# EAGLE board power_board2_v1.0 (EAGLE 9.5.1)
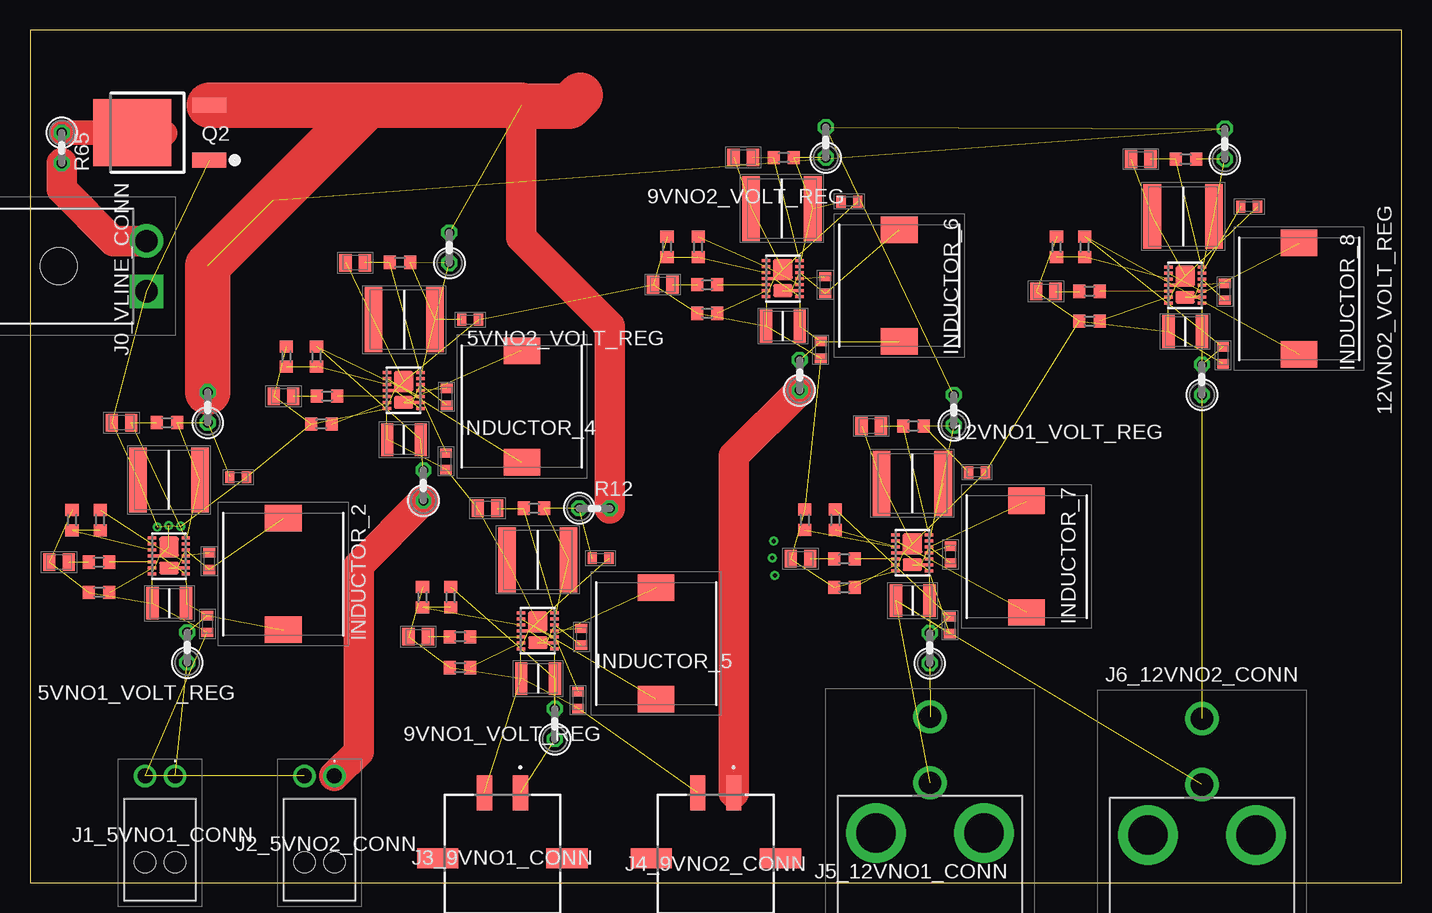
[diagram p0: board, top side]

Size 114.3 x 71.12 mm. Coordinates in mm from the lower left corner, seen from the top.
Outline: 0,0 114.3,0 114.3,71.12 0,71.12 0,0
Copper layers (1*16): Top 0.035mm / dielectric 1.5mm / Bottom 0.035mm
Design rules "default": minimum track width 6mil, minimum drill 0.35mm, track to track 6mil, track to pad 6mil, pad to pad 6mil, via to via 6mil, smd to smd 6mil, copper to edge 40mil, drill to drill 6mil, minimum pad ring 10mil, minimum via ring 8mil, stop-mask expansion 4mil, vias tented up to drill 0mil, thermal gap 10mil

## Footprints (pad centres in the part's own frame; a part is rotated, then mirrored left to right if it is on the bottom)
DFN14-4X3DE = smd 0.25 x 0.7: 1 -1.5,-1.4; 2 -1,-1.4; 3 -0.5,-1.4; 5 0.5,-1.4; 6 1,-1.4; 7 1.5,-1.4; 8 1.5,1.4; 10 0.5,1.4; 11 0,1.4; 12 -0.5,1.4; 13 -1,1.4; 14 -1.5,1.4 | smd 0.25 x 2: 4 0,-0.75; 9 1,0.75 | smd 1.75 x 1.65: 4@1 -0.75,0 | smd 1.07 x 1.65: 9@2 1,0
CAPC5750X279N = smd 1.47 x 5.41: 1 -2.57,0; 2 2.57,0
CAPC1608X90N = smd 0.78 x 0.99: 1 -0.7,0; 2 0.7,0
CAPC2012X140N = smd 1.02 x 1.47: 1 -0.81,0; 2 0.81,0
CAPC3225X279N = smd 1.02 x 2.72: 1 -1.4,0; 2 1.4,0
INDPM102100X400N = smd 2.2 x 3.05: 1 -4.65,0; 2 4.65,0
1726480102 = drill 1.85 pad 2.775 square: 1 0,0 | drill 1.85 pad 2.775: 2 -4.2,0 | hole 3.05: -2.1,-7.3
1053131102 = drill 1.25 pad 1.875: 1 0,0; 2 -2.5,0 | hole 1.75: 0,-7.18; -2.5,-7.18
43650-0214 = smd 1.27 x 2.92: 1 1.5,10.07; 2 -1.5,10.07 | smd 3.43 x 1.65: 3 -5.385,4.6; 4 5.385,4.6
874270212 = drill 1.85 pad 2.775: 1 0,0; 2 0,5.5 | drill 3.3 pad 4.95: MH1 -4.5,-4.2; MH2 4.5,-4.2
DPAK3-CASE-369AS = smd 1.25 x 2.85: 1 -2.28,-6.4; 2 2.28,-6.4 | smd 5.55 x 6.5: 3 0,0
R0603 = smd 1 x 1.1: 1 -0.85,0; 2 0.85,0
0207/2V = drill 0.813 octagon: 1 -1.27,0; 2 1.27,0

## Placement (x,y rotation side)
5VNO1_VOLT_REG  LT3681  [DFN14-4X3DE]  11.58,27.25 270 top
5VNO2_VOLT_REG  LT3681  [DFN14-4X3DE]  31.14,41.07 270 top
9VNO1_VOLT_REG  LT3681  [DFN14-4X3DE]  42.32,21.03 270 top
9VNO2_VOLT_REG  LT3681  [DFN14-4X3DE]  62.74,50.39 270 top
12VNO1_VOLT_REG  LT3681  [DFN14-4X3DE]  73.53,27.53 270 top
12VNO2_VOLT_REG  LT3681  [DFN14-4X3DE]  96.27,49.83 270 top
C1  10u  [CAPC5750X279N]  31.19,46.96 180 top
C2  100n  [CAPC1608X90N]  36.68,46.96 0 top
C3  .33n  [CAPC2012X140N]  21.13,40.59 180 top
C4  .33n  [CAPC2012X140N]  2.41,26.75 180 top
C5  10u  [CAPC5750X279N]  42.32,26.95 180 top
C6  220n  [CAPC2012X140N]  7.62,38.38 180 top
C7  50.8u  [CAPC3225X279N]  11.61,23.32 180 top
C8  470n  [CAPC1608X90N]  14.94,26.82 270 top
C9  100n  [CAPC1608X90N]  14.78,21.59 270 top
C10  100n  [CAPC1608X90N]  47.55,27.08 0 top
C11  .33n  [CAPC2012X140N]  32.36,20.52 180 top
C12  220n  [CAPC2012X140N]  38.13,31.24 180 top
C13  10u  [CAPC5750X279N]  62.66,56.24 180 top
C14  220n  [CAPC2012X140N]  27.1,51.71 180 top
C15  50.8u  [CAPC3225X279N]  31.17,36.96 180 top
C16  100n  [CAPC1608X90N]  68.28,56.82 0 top
C17  .33n  [CAPC2012X140N]  52.73,49.89 180 top
C18  220n  [CAPC2012X140N]  59.44,60.5 180 top
C19  26.7u  [CAPC3225X279N]  42.34,17.04 180 top
C20  470n  [CAPC1608X90N]  45.95,20.52 270 top
C21  470n  [CAPC1608X90N]  66.27,49.86 270 top
C22  26.7u  [CAPC3225X279N]  62.74,46.43 180 top
C23  470n  [CAPC1608X90N]  76.71,27.38 270 top
C24  22u  [CAPC3225X279N]  73.56,23.55 180 top
C25  470n  [CAPC1608X90N]  99.57,49.3 270 top
C26  10u  [CAPC5750X279N]  73.53,33.32 180 top
C27  100n  [CAPC1608X90N]  78.92,34.24 0 top
C28  .33n  [CAPC2012X140N]  64.21,27.03 180 top
C29  220n  [CAPC2012X140N]  70.1,38.1 180 top
C30  10u  [CAPC5750X279N]  96.09,55.58 180 top
C31  100n  [CAPC1608X90N]  101.6,56.39 0 top
C32  22u  [CAPC3225X279N]  96.27,45.97 180 top
C33  470n  [CAPC1608X90N]  34.72,40.54 270 top
C34  100n  [CAPC1608X90N]  34.67,35.15 270 top
C35  .33n  [CAPC2012X140N]  84.66,49.33 180 top
C36  220n  [CAPC2012X140N]  92.56,60.35 180 top
C58  10u  [CAPC5750X279N]  11.58,33.6 180 top
C59  100n  [CAPC1608X90N]  17.35,33.83 0 top
C60  100n  [CAPC1608X90N]  45.67,15.24 270 top
C61  100n  [CAPC1608X90N]  65.89,44.45 270 top
C62  100n  [CAPC1608X90N]  99.42,43.99 270 top
C63  100n  [CAPC1608X90N]  76.66,21.49 270 top
INDUCTOR_2  CDRH104RNP-150NC  [INDPM102100X400N]  21.11,25.76 270 top
INDUCTOR_4  CDRH104RNP-150NC  [INDPM102100X400N]  41,39.73 270 top
INDUCTOR_5  CDRH104RNP-150NC  [INDPM102100X400N]  52.17,19.96 270 top
INDUCTOR_6  CDRH104RNP-150NC  [INDPM102100X400N]  72.44,49.81 270 top
INDUCTOR_7  CDRH104RNP-150NC  [INDPM102100X400N]  83.06,27.2 270 top
INDUCTOR_8  CDRH104RNP-150NC  [INDPM102100X400N]  105.77,48.72 270 top
J0_VLINE_CONN  172648-0102  [1726480102]  9.7,49.33 270 top
J1_5VNO1_CONN  105313-1102  [1053131102]  12.09,8.92 0 top
J2_5VNO2_CONN  105313-1102  [1053131102]  25.37,8.92 0 top
J3_9VNO1_CONN  43650-0212  [43650-0214]  39.37,-2.54 0 top
J4_9VNO2_CONN  43650-0212  [43650-0214]  57.15,-2.54 0 top
J5_12VNO1_CONN  87427-0212  [874270212]  75.01,8.36 0 top
J6_12VNO2_CONN  87427-0212  [874270212]  97.66,8.2 0 top
Q2  FQD11P06TM  [DPAK3-CASE-369AS]  8.53,62.56 90 top
R1  133k  [R0603]  35.84,17.96 0 top
R2  133k  [R0603]  24.28,38.28 0 top
R3  20k  [R0603]  24.77,40.59 0 top
R4  15k  [R0603]  30.84,51.74 0 top
R5  0  [0207/2V]  34.95,52.96 90 top
R6  15k  [R0603]  11.43,38.38 0 top
R7  0  [0207/2V]  14.81,39.65 90 top
R8  200k  [R0603]  3.51,30.25 270 top
R9  590k  [R0603]  5.84,30.25 270 top
R10  20k  [R0603]  35.84,20.52 0 top
R11  15k  [R0603]  42.01,31.24 0 top
R12  0  [0207/2V]  47.04,31.24 0 top
R13  133k  [R0603]  56.44,47.5 0 top
R14  0  [0207/2V]  13.11,19.63 90 top
R15  200k  [R0603]  21.36,43.89 270 top
R16  20k  [R0603]  56.44,49.89 0 top
R17  15k  [R0603]  62.81,60.48 0 top
R18  0  [0207/2V]  66.32,61.75 90 top
R19  133k  [R0603]  32.72,23.83 270 top
R20  806k  [R0603]  35.05,23.83 270 top
R21  0  [0207/2V]  43.74,13.26 90 top
R22  100k  [R0603]  64.57,30.28 270 top
R23  845k  [R0603]  67.11,30.28 270 top
R24  0  [0207/2V]  74.98,19.58 90 top
R25  100k  [R0603]  85.55,53.04 270 top
R26  845k  [R0603]  87.88,53.04 270 top
R27  0  [0207/2V]  97.66,41.96 90 top
R28  133k  [R0603]  67.87,24.64 0 top
R29  20k  [R0603]  67.87,27.03 0 top
R30  15k  [R0603]  73.61,38.1 0 top
R31  0  [0207/2V]  76.99,39.42 90 top
R32  133k  [R0603]  53.09,53.04 270 top
R33  590k  [R0603]  23.88,43.89 270 top
R34  0  [0207/2V]  32.79,33.15 90 top
R35  133k  [R0603]  88.29,46.84 0 top
R36  20k  [R0603]  88.29,49.33 0 top
R61  133k  [R0603]  5.77,24.23 0 top
R62  20k  [R0603]  5.74,26.75 0 top
R63  806k  [R0603]  55.68,53.04 270 top
R64  0  [0207/2V]  64.14,42.34 90 top
R65  0  [0207/2V]  2.64,61.29 270 top
R68  15k  [R0603]  96.32,60.35 0 top
R69  0  [0207/2V]  99.57,61.62 90 top

## Library data of the parts
5VNO1_VOLT_REG 5VNO2_VOLT_REG 9VNO1_VOLT_REG 9VNO2_VOLT_REG 12VNO1_VOLT_REG 12VNO2_VOLT_REG = linear-technology; MPN: LT3681EDE#PBF; OC_FARNELL: 1627603; OC_NEWARK: 57M8550
C1 C5 C13 C26 C30 C58 = 22201C106KAT2A; DESCRIPTION: Cap Ceramic 10uF 100V X7R 10% Pad SMD 2220 125C T/R; HEIGHT: 2.79mm; MANUFACTURER_NAME: AVX; MANUFACTURER_PART_NUMBER: 22201C106KAT2A; MOUSER_PART_NUMBER: 581-22201C106KAT2A; MOUSER_PRICE-STOCK: https://www.mouser.com/Search/Refine.aspx?Keyword=581-22201C106KAT2A
C2 C10 C16 C27 C31 C59 = 06031C104KAT2A; DESCRIPTION: AVX - 06031C104KAT2A - CAP, MLCC, X7R, 0.1UF, 100V, 0603; HEIGHT: 0.9mm; MANUFACTURER_NAME: AVX; MANUFACTURER_PART_NUMBER: 06031C104KAT2A; MOUSER_PART_NUMBER: 581-06031C104KAT2A; MOUSER_PRICE-STOCK: https://www.mouser.com/Search/Refine.aspx?Keyword=581-06031C104KAT2A
C3 C4 C11 C17 C28 C35 = 08053C334KAT2A; DESCRIPTION: AVX 0805 Standard 0.33uF Ceramic Multilayer Capacitor, 25 V dc, +125; HEIGHT: 1.4mm; MANUFACTURER_NAME: AVX; MANUFACTURER_PART_NUMBER: 08053C334KAT2A; MOUSER_PART_NUMBER: 581-08053C334KAT2A; MOUSER_PRICE-STOCK: https://www.mouser.com/Search/Refine.aspx?Keyword=581-08053C334KAT2A; RS_PART_NUMBER: 1747387; RS_PRICE-STOCK: http://uk.rs-online.com/web/p/products/1747387
C6 C12 C14 C18 C29 C36 = 08051C224KAT2A; DESCRIPTION: Cap Ceramic 0.22uF 100V X7R 10% Pad SMD 0805 125C T/R; HEIGHT: 1.4mm; MANUFACTURER_NAME: AVX; MANUFACTURER_PART_NUMBER: 08051C224KAT2A; MOUSER_PART_NUMBER: 581-08051C224KAT2A; MOUSER_PRICE-STOCK: https://www.mouser.com/Search/Refine.aspx?Keyword=581-08051C224KAT2A
C7 C15 C19 C22 C24 C32 = 12103C226KAT2A; DESCRIPTION: Multilayer Ceramic Capacitors MLCC - SMD/SMT 25V 22uF X7R 1210 0.1; HEIGHT: 2.79mm; MANUFACTURER_NAME: AVX; MANUFACTURER_PART_NUMBER: 12103C226KAT2A; MOUSER_PART_NUMBER: 581-12103C226KAT2A; MOUSER_PRICE-STOCK: https://www.mouser.com/Search/Refine.aspx?Keyword=581-12103C226KAT2A
C8 C20 C21 C23 C25 C33 = 06033C474JAT2A; DESCRIPTION: Multilayer Ceramic Capacitors MLCC - SMD/SMT 25V 470nF X7R 0603 +5%; HEIGHT: 0.9mm; MANUFACTURER_NAME: AVX; MANUFACTURER_PART_NUMBER: 06033C474JAT2A; MOUSER_PART_NUMBER: 581-06033C474JAT2A; MOUSER_PRICE-STOCK: https://www.mouser.com/Search/Refine.aspx?Keyword=581-06033C474JAT2A
C9 C34 C60-C63 = 06033C104KAT4A; DESCRIPTION: Multilayer Ceramic Capacitors MLCC - SMD/SMT 25volts 0.1uF 10% X7R; HEIGHT: 0.9mm; MANUFACTURER_NAME: AVX; MANUFACTURER_PART_NUMBER: 06033C104KAT4A; MOUSER_PART_NUMBER: 581-06033C104KAT4A; MOUSER_PRICE-STOCK: https://www.mouser.com/Search/Refine.aspx?Keyword=581-06033C104KAT4A
INDUCTOR_2 INDUCTOR_4-INDUCTOR_8 = CDRH104RNP-150NC; DESCRIPTION: Fixed Inductors 15uH 3.1A; HEIGHT: 4mm; MANUFACTURER_NAME: Sumida; MANUFACTURER_PART_NUMBER: CDRH104RNP-150NC; MOUSER_PART_NUMBER: 851-CDRH104RNP-150NC; MOUSER_PRICE-STOCK: https://www.mouser.com/Search/Refine.aspx?Keyword=851-CDRH104RNP-150NC
J0_VLINE_CONN = 172648-0102; DESCRIPTION: Board to Board & Mezzanine Connectors; HEIGHT: 5.4mm; MANUFACTURER_NAME: Molex; MANUFACTURER_PART_NUMBER: 172648-0102; MOUSER_PART_NUMBER: 538-172648-0102; MOUSER_PRICE-STOCK: https://www.mouser.com/Search/Refine.aspx?Keyword=538-172648-0102
J1_5VNO1_CONN J2_5VNO2_CONN = 105313-1102; DESCRIPTION: Molex Nano-Fit 105313, 2.5mm Pitch, 2 Way, 1 Row, Right Angle PCB Header, Through Hole; HEIGHT: 6.84mm; MANUFACTURER_NAME: Molex; MANUFACTURER_PART_NUMBER: 105313-1102; MOUSER_PART_NUMBER: 538-105313-1102; MOUSER_PRICE-STOCK: https://www.mouser.com/Search/Refine.aspx?Keyword=538-105313-1102; RS_PART_NUMBER: 1623686; RS_PRICE-STOCK: http://uk.rs-online.com/web/p/products/1623686
J3_9VNO1_CONN J4_9VNO2_CONN = 43650-0212; ALLIED_NUMBER: 70266892; ALLIED_PRICE-STOCK: https://www.alliedelec.com/molex-incorporated-43650-0212/70266892/; DESCRIPTION: Molex MICRO-FIT 3.0 Series, Series Number 43650, 3mm Pitch 2 Way 1 Row Shrouded Right Angle PCB Header, Surface Mount; HEIGHT: mm; MANUFACTURER_NAME: Molex; MANUFACTURER_PART_NUMBER: 43650-0212; MOUSER_PART_NUMBER: 538-43650-0212; MOUSER_PRICE-STOCK: https://www.mouser.com/Search/Refine.aspx?Keyword=538-43650-0212; RS_PART_NUMBER: 4476811P; RS_PRICE-STOCK: http://uk.rs-online.com/web/p/products/4476811P
J5_12VNO1_CONN J6_12VNO2_CONN = 87427-0212; DESCRIPTION: Headers & Wire Housings Minifit Jr. Header ( Header (high temp.); HEIGHT: 10.2mm; MANUFACTURER_NAME: Molex; MANUFACTURER_PART_NUMBER: 87427-0212; MOUSER_PART_NUMBER: 538-87427-0212; MOUSER_PRICE-STOCK: https://www.mouser.com/Search/Refine.aspx?Keyword=538-87427-0212
Q2 = FQD11P06TM; DESCRIPTION: FQD11P06TM P-Channel MOSFET, 9.4 A, 60 V, 3-Pin DPAK ON Semiconductor; HEIGHT: mm; MANUFACTURER_NAME: ON Semiconductor; MANUFACTURER_PART_NUMBER: FQD11P06TM; MOUSER_PART_NUMBER: 512-FQD11P06TM; MOUSER_PRICE-STOCK: https://www.mouser.com/Search/Refine.aspx?Keyword=512-FQD11P06TM; RS_PART_NUMBER: 6710949P; RS_PRICE-STOCK: http://uk.rs-online.com/web/p/products/6710949P
R1-R4 R6 R8-R11 R13 R15-R17 R19 R20 R22 R23 R25 R26 R28-R30 R32 R33 R35 R36 R61-R63 R68 = rcl; SPICEPREFIX: R
R5 R7 R12 R14 R18 R21 R24 R27 R31 R34 R64 R65 R69 = rcl; DESC: RES SMD 10K OHM 1% 1/8W 0805; MFR: Yageo; MPN: RC0805FR-0710KL; SPICEPREFIX: R

## Nets
CBOOST_5VNO1: 5VNO1_VOLT_REG.11 C8.1
CBOOST_5VNO2: 5VNO2_VOLT_REG.11 C33.1
CBOOST_9VNO1: 9VNO1_VOLT_REG.11 C20.1
CBOOST_9VNO2: 9VNO2_VOLT_REG.11 C21.1
CBOOST_12VNO1: 12VNO1_VOLT_REG.11 C23.1
CBOOST_12VNO2: 12VNO2_VOLT_REG.11 C25.1
FB_5VNO1: 5VNO1_VOLT_REG.3 R8.2 R9.2
FB_5VNO2: 5VNO2_VOLT_REG.3 R15.2 R33.2
FB_9VNO1: 9VNO1_VOLT_REG.3 R19.2 R20.2
FB_9VNO2: 9VNO2_VOLT_REG.3 R32.2 R63.2
FB_12VNO1: 12VNO1_VOLT_REG.3 R22.2 R23.2
FB_12VNO2: 12VNO2_VOLT_REG.3 R25.2 R26.2
GND: 5VNO1_VOLT_REG.4 5VNO1_VOLT_REG.4@1 5VNO1_VOLT_REG.7 5VNO1_VOLT_REG.8 5VNO2_VOLT_REG.4 5VNO2_VOLT_REG.4@1 5VNO2_VOLT_REG.7 5VNO2_VOLT_REG.8 9VNO1_VOLT_REG.4 9VNO1_VOLT_REG.4@1 9VNO1_VOLT_REG.7 9VNO1_VOLT_REG.8 9VNO2_VOLT_REG.4 9VNO2_VOLT_REG.4@1 9VNO2_VOLT_REG.7 9VNO2_VOLT_REG.8 12VNO1_VOLT_REG.4 12VNO1_VOLT_REG.4@1 12VNO1_VOLT_REG.7 12VNO1_VOLT_REG.8 12VNO2_VOLT_REG.4 12VNO2_VOLT_REG.4@1 12VNO2_VOLT_REG.7 C1.2 C2.2 C3.2 C4.2 C5.2 C6.2 C7.2 C9.2 C10.2 C11.2 C12.2 C13.2 C14.2 C15.2 C16.2 C17.2 C18.2 C19.2 C22.2 C24.2 C26.2 C27.2 C28.2 C29.2 C30.2 C31.2 C32.2 C34.2 C35.2 C36.2 C58.2 C59.2 C60.2 C61.2 C62.2 C63.2 J0_VLINE_CONN.1 J1_5VNO1_CONN.2 J2_5VNO2_CONN.2 J3_9VNO1_CONN.2 J4_9VNO2_CONN.2 J5_12VNO1_CONN.1 J6_12VNO2_CONN.1 Q2.1 R1.1 R2.1 R8.1 R13.1 R15.1 R19.1 R22.1 R25.1 R28.1 R32.1 R35.1 R61.1
N$1: C4.1 R62.1
N$4: C3.1 R3.1
N$5: C11.1 R10.1
N$6: C17.1 R16.1
N$17: C28.1 R29.1
N$18: C35.1 R36.1
RT_5VNO1: 5VNO1_VOLT_REG.6 R61.2
RT_5VNO2: 5VNO2_VOLT_REG.6 R2.2
RT_9VNO1: 9VNO1_VOLT_REG.6 R1.2
RT_9VNO2: 9VNO2_VOLT_REG.6 R13.2
RT_12VNO1: 12VNO1_VOLT_REG.6 R28.2
RT_12VNO2: 12VNO2_VOLT_REG.6 R35.2
RUN/SS_5VNO1: 5VNO1_VOLT_REG.14 C6.1 R6.1
RUN/SS_5VNO2: 5VNO2_VOLT_REG.14 C14.1 R4.1
RUN/SS_9VNO1: 9VNO1_VOLT_REG.14 C12.1 R11.1
RUN/SS_9VNO2: 9VNO2_VOLT_REG.14 C18.1 R17.1
RUN/SS_12VNO1: 12VNO1_VOLT_REG.14 C29.1 R30.1
RUN/SS_12VNO2: 12VNO2_VOLT_REG.14 C36.1 R68.1
SW_5VNO1: 5VNO1_VOLT_REG.9 5VNO1_VOLT_REG.9@2 5VNO1_VOLT_REG.12 C8.2 INDUCTOR_2.1
SW_5VNO2: 5VNO2_VOLT_REG.9 5VNO2_VOLT_REG.9@2 5VNO2_VOLT_REG.12 C33.2 INDUCTOR_4.1
SW_9VNO1: 9VNO1_VOLT_REG.9 9VNO1_VOLT_REG.9@2 9VNO1_VOLT_REG.12 C20.2 INDUCTOR_5.1
SW_9VNO2: 9VNO2_VOLT_REG.9 9VNO2_VOLT_REG.9@2 9VNO2_VOLT_REG.12 C21.2 INDUCTOR_6.1
SW_12VNO1: 12VNO1_VOLT_REG.9 12VNO1_VOLT_REG.9@2 12VNO1_VOLT_REG.12 C23.2 INDUCTOR_7.1
SW_12VNO2: 12VNO2_VOLT_REG.9 12VNO2_VOLT_REG.9@2 12VNO2_VOLT_REG.12 C25.2 INDUCTOR_8.1
V_5VNO1: 5VNO1_VOLT_REG.2 5VNO1_VOLT_REG.10 C7.1 C9.1 INDUCTOR_2.2 R9.1 R14.2
V_5VNO1_0: J1_5VNO1_CONN.1 R14.1
V_5VNO2: 5VNO2_VOLT_REG.2 5VNO2_VOLT_REG.10 C15.1 C34.1 INDUCTOR_4.2 R33.1 R34.2
V_5VNO2_0: J2_5VNO2_CONN.1 R34.1
V_9VNO1: 9VNO1_VOLT_REG.2 9VNO1_VOLT_REG.10 C19.1 C60.1 INDUCTOR_5.2 R20.1 R21.2
V_9VNO1_0: J3_9VNO1_CONN.1 R21.1
V_9VNO2: 9VNO2_VOLT_REG.2 9VNO2_VOLT_REG.10 C22.1 C61.1 INDUCTOR_6.2 R63.1 R64.2
V_9VNO2_0: J4_9VNO2_CONN.1 R64.1
V_12VNO1: 12VNO1_VOLT_REG.2 12VNO1_VOLT_REG.10 C24.1 C63.1 INDUCTOR_7.2 R23.1 R24.2
V_12VNO1_0: J5_12VNO1_CONN.2 R24.1
V_12VNO2: 12VNO2_VOLT_REG.2 12VNO2_VOLT_REG.10 C32.1 C62.1 INDUCTOR_8.2 R26.1 R27.2
V_12VNO2_0: J6_12VNO2_CONN.2 R27.1
V_VLINE: Q2.2 R5.2 R7.2 R12.2 R18.2 R31.2 R69.2
V_VLINE00: J0_VLINE_CONN.2 R65.2
V_VLINE0: Q2.3 R65.1
VC_5VNO1: 5VNO1_VOLT_REG.5 R62.2
VC_5VNO2: 5VNO2_VOLT_REG.5 R3.2
VC_9VNO1: 9VNO1_VOLT_REG.5 R10.2
VC_9VNO2: 9VNO2_VOLT_REG.5 R16.2
VC_12VNO1: 12VNO1_VOLT_REG.5 R29.2
VC_12VNO2: 12VNO2_VOLT_REG.5 R36.2
VIN_5VNO1: 5VNO1_VOLT_REG.13 C58.1 C59.1 R6.2 R7.1
VIN_5VNO2: 5VNO2_VOLT_REG.13 C1.1 C2.1 R4.2 R5.1
VIN_9VNO1: 9VNO1_VOLT_REG.13 C5.1 C10.1 R11.2 R12.1
VIN_9VNO2: 9VNO2_VOLT_REG.13 C13.1 C16.1 R17.2 R18.1
VIN_12VNO1: 12VNO1_VOLT_REG.13 C26.1 C27.1 R30.2 R31.1
VIN_12VNO2: 12VNO2_VOLT_REG.13 C30.1 C31.1 R68.2 R69.1

## Tracks (layer width: path | path; a pad name or v marks a point on that pad's centre or on a via)
CBOOST_5VNO1  (1 unrouted)
CBOOST_5VNO2  (1 unrouted)
CBOOST_9VNO1  (1 unrouted)
CBOOST_9VNO2  (1 unrouted)
CBOOST_12VNO1  (1 unrouted)
CBOOST_12VNO2  (1 unrouted)
FB_5VNO1  (2 unrouted)
FB_5VNO2  (2 unrouted)
FB_9VNO1  (2 unrouted)
FB_9VNO2  (2 unrouted)
FB_12VNO1  (2 unrouted)
FB_12VNO2  (2 unrouted)
GND  (via drill 0.35)  (81 unrouted)
  other vias: 10.59,29.67 11.56,29.79 12.55,29.74
N$1  (1 unrouted)
N$2  (via drill 0.35)
  other vias: 61.98,28.5
N$3  (via drill 0.35)
  other vias: 61.85,27.1
N$4  (1 unrouted)
N$5  (1 unrouted)
N$6  (1 unrouted)
N$7  (via drill 0.35)
  other vias: 62.08,25.63
N$17  (1 unrouted)
N$18  (1 unrouted)
RT_5VNO1  (1 unrouted)
RT_5VNO2  (1 unrouted)
RT_9VNO1  (1 unrouted)
RT_9VNO2  (1 unrouted)
RT_12VNO1  (1 unrouted)
RT_12VNO2  (1 unrouted)
RUN/SS_5VNO1  (2 unrouted)
RUN/SS_5VNO2  (2 unrouted)
RUN/SS_9VNO1  (2 unrouted)
RUN/SS_9VNO2  (2 unrouted)
RUN/SS_12VNO1  (2 unrouted)
RUN/SS_12VNO2  (2 unrouted)
SW_5VNO1  (4 unrouted)
SW_5VNO2  (4 unrouted)
SW_9VNO1  (4 unrouted)
SW_9VNO2  (4 unrouted)
SW_12VNO1  (4 unrouted)
SW_12VNO2  (4 unrouted)
V_5VNO1  (6 unrouted)
V_5VNO1_0  (1 unrouted)
V_5VNO2  (6 unrouted)
V_5VNO2_0
  Top 2.54: R34.1 27.41,26.49 27.41,10.95 J2_5VNO2_CONN.1
V_9VNO1  (6 unrouted)
V_9VNO1_0  (1 unrouted)
V_9VNO2  (6 unrouted)
V_9VNO2_0
  Top 2.54: R64.1 58.65,35.59 J4_9VNO2_CONN.1
V_12VNO1  (6 unrouted)
V_12VNO1_0  (1 unrouted)
V_12VNO2  (6 unrouted)
V_12VNO2_0  (1 unrouted)
V_VLINE  (5 unrouted)
  Top 2.54: R12.2 48.31,46.43 40.92,53.82 40.92,64.76 40.92,64.84
  Top 3.81: Q2.2 28.17,64.84 | 28.17,64.84 40.92,64.84 | 40.92,64.76 44.95,64.76 45.87,65.68 | R7.2 14.81,51.48 28.17,64.84
V_VLINE00
  Top 2.54: J0_VLINE_CONN.2 6.95,53.53 2.64,57.84 R65.2
V_VLINE0
  Top 2.032: R65.1 Q2.3 | Q2.3 11.23,62.56 11.25,62.53 10.25,61.53 9.56,61.53 Q2.3
VC_5VNO1  (1 unrouted)
VC_5VNO2  (1 unrouted)
VC_9VNO1  (1 unrouted)
VC_9VNO2  (1 unrouted)
VC_12VNO1  (1 unrouted)
VC_12VNO2  (1 unrouted)
VIN_5VNO1  (4 unrouted)
VIN_5VNO2  (4 unrouted)
VIN_9VNO1  (4 unrouted)
VIN_9VNO2  (4 unrouted)
VIN_12VNO1  (4 unrouted)
VIN_12VNO2  (4 unrouted)